# Altium PCB PPSDO.PcbDoc
Units mil, origin at the board's own origin, x right, y up, seen from the top; angles counter-clockwise.
Board outline 905.51 x 787.4 mil, 4 copper layers (Top Layer, Layer 1, Layer 2, Bottom Layer), stack 28.976 mil thick; 74 components, 71 nets, 259 pads, 143 vias.
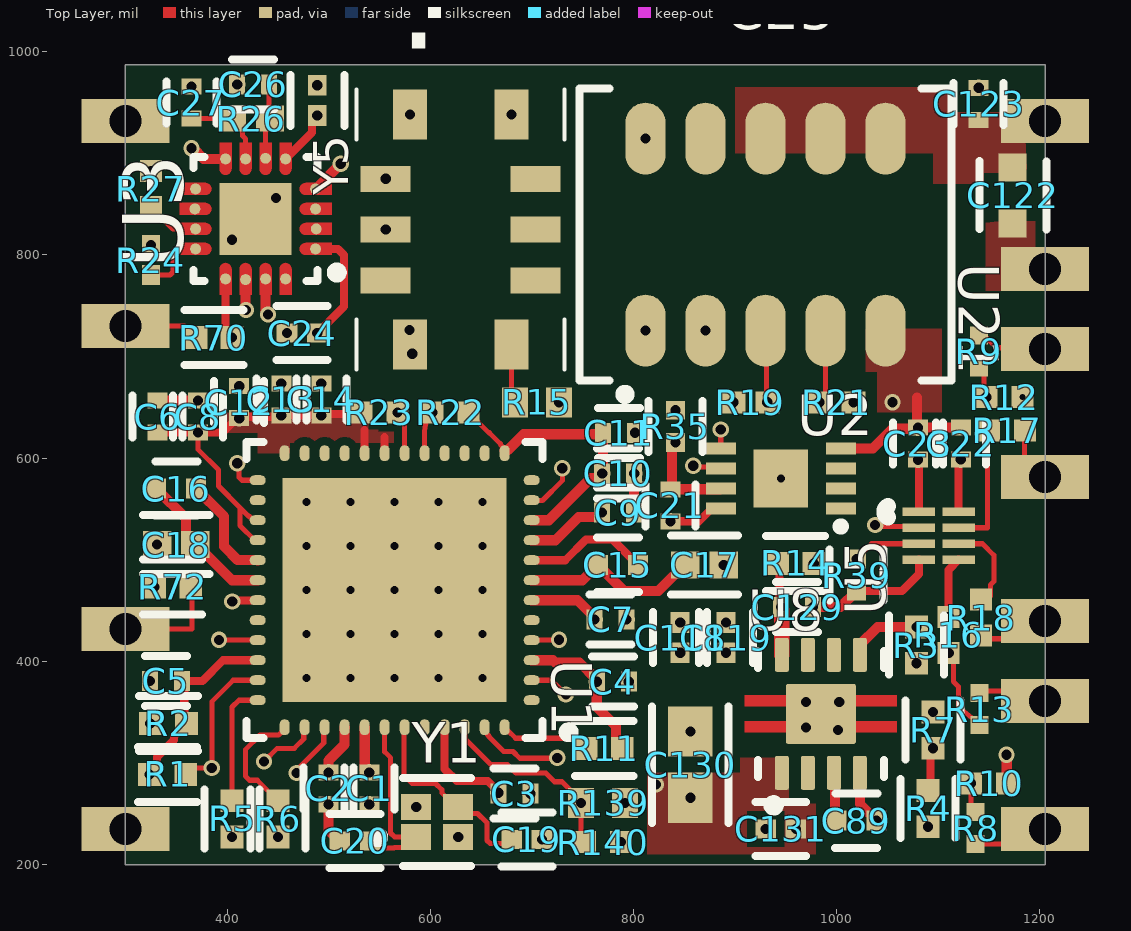
[diagram p0: Top Layer view]
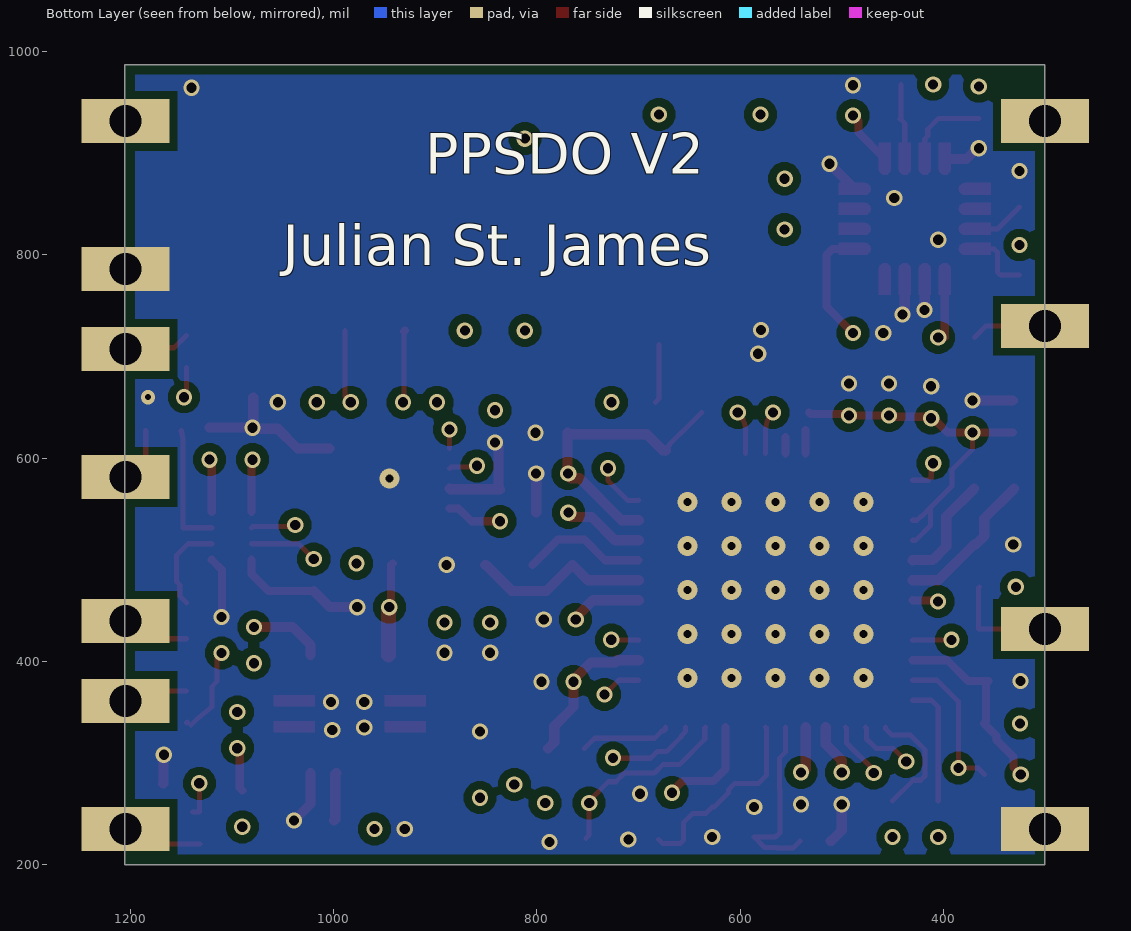
[diagram p1: Bottom Layer view, seen from below]
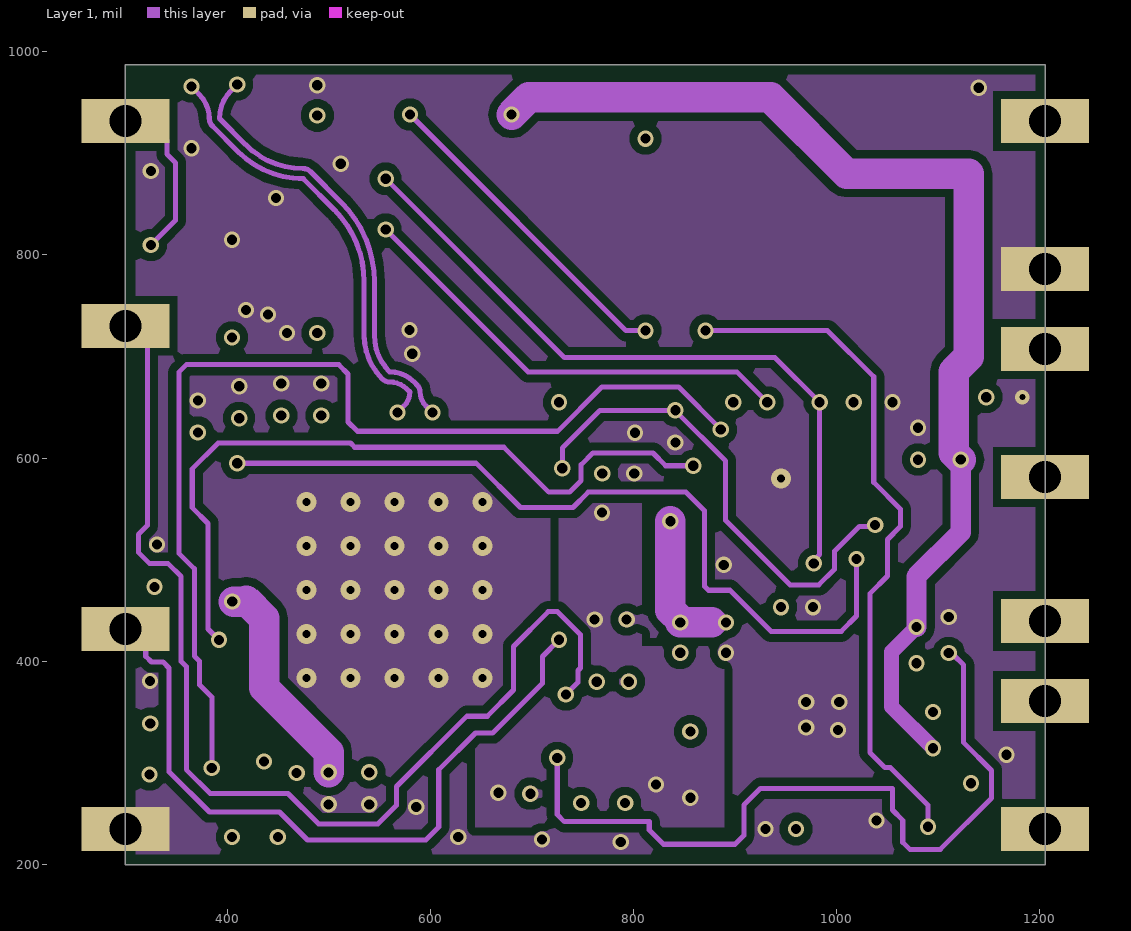
[diagram p2: Layer 1]
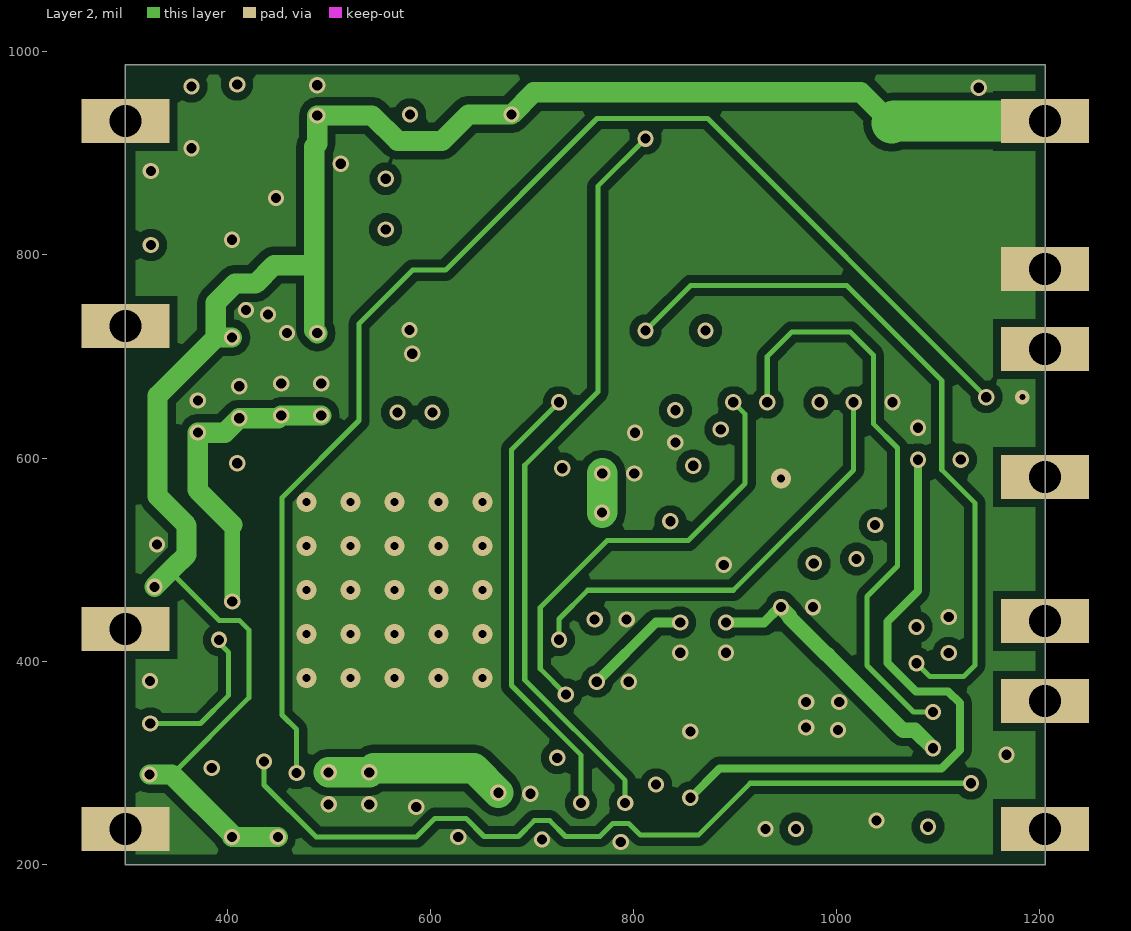
[diagram p3: Layer 2]
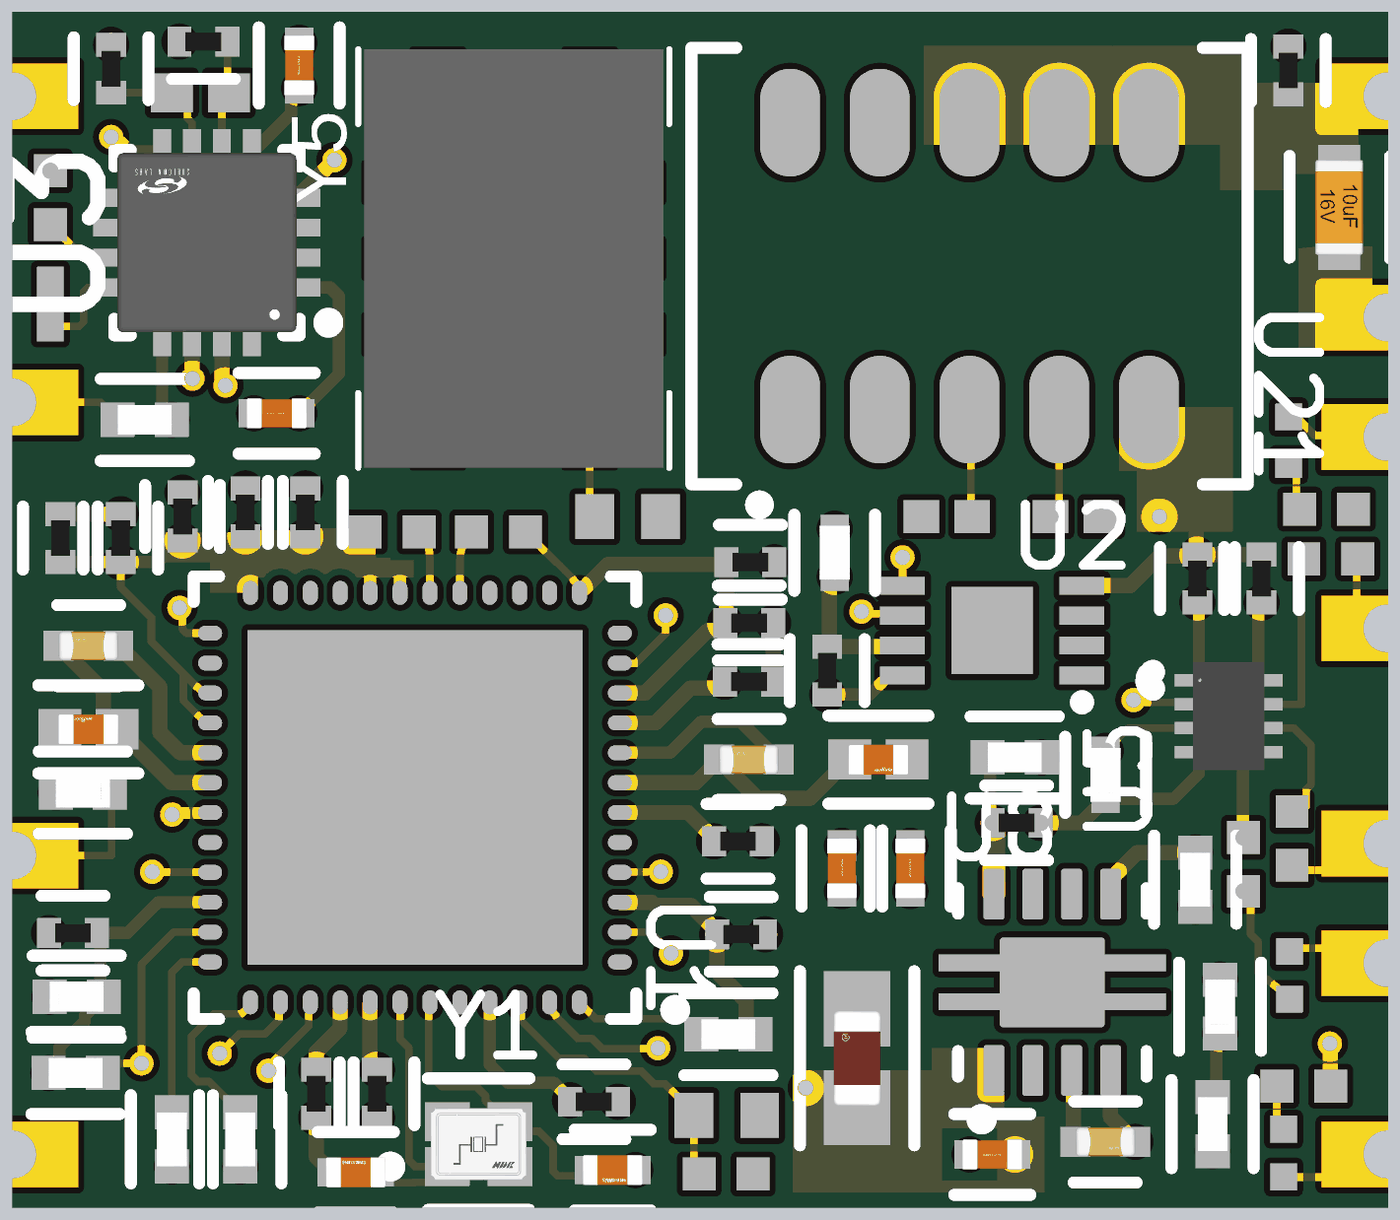
[diagram p4: 3D render of the assembled board from above, using the file's embedded part models]

## Layer stack, top to bottom
Top Solder: solder mask 0.4, Solder Resist, Dk 3.5
Top Layer: signal copper 1.378
Dielectric 2: core 7.9921, Core-009, Dk 4.5
Layer 1: signal copper 1.1811
Dielectric 1: dielectric 7.874, FR-4, Dk 4.8
Layer 2: signal copper 1.1811
Dielectric 3: core 7.9921, Core-009, Dk 4.5
Bottom Layer: signal copper 1.378
Bottom Solder: solder mask 0.4, Solder Resist, Dk 3.5

## Board outline
300,200 300,987.4 1205.51,987.4 1205.51,200

## Design rules (kind name [scope] priority, off if disabled: settings)
BoardOutlineClearance [All] p1: gap=10 ignorepadtopadclearanceinfootprint=FALSE except(0: Arc-SplitContinuation Track-SplitContinuation SMDPad-SplitContinuation THPad-SplitContinuation Via-SplitContinuation Fill-SplitContinuation Poly-SplitContinuation Region-SplitContinuation Text-SplitContinuation)
Clearance [All] p1: gap=8 ignorepadtopadclearanceinfootprint=TRUE
DiffPairsRouting [All] p1: maxlimit=10 minlimit=5 mostfreqgap=5 toplayer_minwidth=5 toplayer_maxwidth=15 toplayer_prefwidth=5 midlayer1_minwidth=5 midlayer1_maxwidth=15 midlayer1_prefwidth=5 midlayer2_minwidth=5 midlayer2_maxwidth=15 midlayer2_prefwidth=5 bottomlayer_minwidth=5 bottomlayer_maxwidth=15 bottomlayer_prefwidth=5 maxuncoupledlength=500
PolygonConnect [All] p1: connectstyle=Direct reliefconductorwidth=10 reliefentries=4 polygonreliefangle="90 Angle" airgapwidth=5
RoutingVias [All] p1: holewidth=10 width=16 viastyle="Through Hole" minholewidth=10 minwidth=16 maxholewidth=28 maxwidth=50
SolderMaskExpansion [All] p1: expansion=4 istentingtop=FALSE
Width [All] p1: maxlimit=50 minlimit=5 preferedwidth=5 minimp=50.000000 maximp=50.000000 favimp=50.000000
29 further rules are at their usual default settings.

## Classes and differential pairs
differential pair class 100ohm: DPLL_9513_1PPS_0 DPLL_9513_1PPS_1 DPLL_OUT_0B DPLL_OUT_1A DPLL_OUT_1B
differential pair DPLL_OUT_0C: +DPLL_OUT_0C_P -DPLL_OUT_0C_N
differential pair DPLL_OUT_1B: +DPLL_OUT_1B_P -DPLL_OUT_1B_N

## Components (designator, comment, footprint, x,y, rotation, side; value= is the part's Value field where it differs from the comment)
C1 "GRM155R71C104KA88D" FP-GRM15-MFG 540,275 r90 top value=0.10μF
C2 "GRM155R71C104KA88D" FP-GRM15-MFG 500,275 r90 top value=0.10μF
C3 "GRM155R71C104KA88D" FP-GRM15-MFG 682.8,269.71 r180 top value=0.10μF
C4 "GRM155R71C104KA88D" FP-GRM15-MFG 779.67,379.96 r0 top value=0.10μF
C5 "GRM155R71C104KA88D" FP-GRM15-MFG 339.89,380.76 r0 top value=0.10μF
C6 "GRM155R71C104KA88D" FP-GRM15-MFG 331.59,640.88 r270 top value=0.10μF
C7 "GRM155R71C104KA88D" FP-GRM15-MFG 777.59,441.24 r0 top value=0.10μF
C8 "GRM155R71C104KA88D" FP-GRM15-MFG 371.29,640.88 r270 top value=0.10μF
C9 "GRM155R71C104KA88D" FP-GRM15-MFG 784.81,546.34 r0 top value=0.10μF
C10 "GRM155R71C104KA88D" FP-GRM15-MFG 785,585 r0 top value=0.10μF
C11 "GRM155R71C104KA88D" FP-GRM15-MFG 785.75,625 r0 top value=0.10μF
C12 "GRM155R71C104KA88D" FP-GRM15-MFG 411.98,655.1 r270 top value=0.10μF
C13 "GRM155R71C104KA88D" FP-GRM15-MFG 453.4,657.81 r270 top value=0.10μF
C14 "GRM155R71C104KA88D" FP-GRM15-MFG 492.8,657.81 r270 top value=0.10μF
C15 "CC0402KRX7R9BB392" FP-CC0402-MFG 784.68,495 r180 top value="3.9 nF"
C16 "CC0402KRX7R9BB392" FP-CC0402-MFG 350,570 r180 top value="3.9 nF"
C17 "GRM155R61A224KE19D" FP-GRM155-0_05-IPC_A 870,495 r0 top
C18 "GRM155R61A224KE19D" FP-GRM155-0_05-IPC_A 350,515 r180 top
C19 "CL05C6R2CB5NNNC" FP-CL468-IPC_C 695.1,224.71 r0 top
C20 "CL05C6R2CB5NNNC" FP-CL468-IPC_C 525.98,223.21 r180 top
C21 "0.1uF_16V_0402" FP-GRM15-MFG 836.36,553.61 r90 top value=0.10μF
C22 "0.1uF_16V_0402" FP-GRM15-MFG 1122.22,614.27 r90 top value=0.10μF
C23 "0.1uF_16V_0402" FP-GRM15-MFG 1080,614.25 r90 top value=0.10μF
C24 "1uF_16V_0402" FP-0402-L_1_0_0_05-W_0_5-IPC_C 473.97,723.07 r180 top
C25 "1uF_16V_0402" FP-0402-L_1_0_0_05-W_0_5-IPC_C 488.81,952.14 r90 top
C26 "0.1uF_16V_0402" FP-GRM15-MFG 425.76,967.84 r0 top value=0.10μF
C27 "0.1uF_16V_0402" FP-GRM15-MFG 365,950 r270 top value=0.10μF
C89 "CC0402KRX7R7BB103" FP-CC0402-MFG 1019.45,243.31 r0 top value="10 nF"
C118 "1uF_16V_0402" FP-0402-L_1_0_0_05-W_0_5-IPC_C 846.02,423.36 r270 top
C119 "1uF_16V_0402" FP-0402-L_1_0_0_05-W_0_5-IPC_C 891.02,423.36 r270 top
C122 "10uF_16V_0603" FP-C1608-MFG 1173.3,858.64 r270 top value=10uF
C123 "GRM155R71C104KA88D" FP-GRM15-MFG 1139.85,948.82 r90 top value=0.10μF
C129 "0.1uF_16V_0402" FP-GRM15-MFG 961.02,453.36 r0 top value=0.10μF
C130 "10uF_16V_0603" FP-MK107BA-IPC_A 856.02,298.36 r90 top
C131 "1uF_16V_0402" FP-0402-L_1_0_0_05-W_0_5-IPC_C 945,235 r180 top
R1 "CRCW040210K0JNED" FP-CRCW0402-e3-IPC_B 341.58,288.64 r180 top
R2 "CRCW040210K0JNED" FP-CRCW0402-e3-IPC_B 342.29,338.91 r0 top
R3 "CRCW040210K0JNED" FP-CRCW0402-e3-IPC_B 1078.53,416 r270 top
R4 "CRCW040210K0JNED" FP-CRCW0402-e3-IPC_B 1090,255 r270 top
R5 "CRCW040210K0JNED" FP-CRCW0402-e3-IPC_B 405,245 r270 top
R6 "CRCW040210K0JNED" FP-CRCW0402-e3-IPC_B 450,245 r270 top
R7 "DNI_10K_5%_0402" FP-CRCW0402-e3-IPC_B 1094.9,332.32 r90 top
R8 "44.2_1%_0402" RESC1005X40X25LL05T05 1136.76,235.89 r270 top
R9 "44.2_1%_0402" RESC1005X40X25LL05T05 1140,705 r90 top
R10 "49.9_1%_0402" RESC1005X40X25NL05T05 1150,280 r180 top
R11 "CRCW040210K0JNED" FP-CRCW0402-e3-IPC_B 771.27,314.19 r0 top
R12 "49.9_1%_0402" RESC1005X40X25NL05T05 1165,660 r180 top
R13 "44.2_1%_0402" RESC1005X40X25LL05T05 1140.63,352.9 r90 top
R14 "DNI_10K_5%_0402" FP-CRCW0402-e3-IPC_B 959.71,496.48 r0 top
R15 "DNI_44.2_1%_0402" RESC0402(1005)_M 705,655 r180 top value="44.20 Ohm"
R16 "49.9_1%_0402" RESC1005X40X25NL05T05 1110.33,426 r270 top
R17 "49.9_1%_0402" RESC1005X40X25NL05T05 1167.78,627.22 r180 top
R18 "49.9_1%_0402" RESC1005X40X25NL05T05 1142.32,443.14 r90 top
R19 "0_5%_0402" RESC1005X40X25NL05T10 915,655 r0 top
R21 "0_5%_0402" RESC1005X40X25NL05T10 1000,655 r180 top
R22 "49.9_1%_0402" RESC1005X40X25NL05T05 620,645 r180 top
R23 "49.9_1%_0402" RESC1005X40X25NL05T05 550,645 r0 top
R24 "33_1%_0402" RESC1005X40X25LL05T10 325,795 r90 top
R26 "100_1%_0402" RESC1005X40X25ML05T10 423.72,934.09 r180 top
R27 "49.9_1%_0402" RESC1005X40X25NL05T05 325,865 r90 top
R35 "CRCW0402100RFKED" FP-CRCW0402-e3-IPC_C 841.28,631.24 r270 top
R39 "CRCW0402100RFKED" FP-CRCW0402-e3-IPC_C 1019.56,484.99 r270 top
R70 "CRCW040210K0JNED" FP-CRCW0402-e3-IPC_B 387.17,718.75 r0 top
R72 "CRCW040210K0JNED" FP-CRCW0402-e3-IPC_B 346.39,473.33 r180 top
R139 "44.2_1%_0402" RESC0402(1005)_M 770.19,260.69 r0 top value="44.20 Ohm"
R140 "49.9_1%_0402" RESC1005X40X25NL05T05 769.83,222.11 r180 top
U1 "AD9546" AD9546 565,470 r180 top
U2 "24AA16T-I/MNY" TDFN-MN8 945,580 r180 top locked
U3 "SI53307-B-GM" FP-SI53307-B-GM-MFG 428.08,835.45 r180 top
U5 "NLSV2T244MUTAG" UDFN8_1P20X1P80_ONS 1100.5,523.62 r0 top
U8 "TPS73718DRBR" DRB0008A_V 984.45,348.31 r90 top
U21 "SIT5711" SIT5711 930,820 r90 top
Y1 "NX1612SA-50M-EXS00A-CS08403" FP-NX1612SA-MFG 606.85,241.79 r0 top
Y5 "SiTime_SiT5501AC-WU-33E0-10T" SITIME_SPL-086-CQFN-010-C07050_REV_DRAFT 630,825 r0 top

## Footprints (in the part's own frame and the unit in brackets; to place one, negate y for a bottom-side part, rotate by r counter-clockwise, add the part's x,y. Pads: shape width x height; smd on the part's side, far side on the other; paste and mask are expansions set on the pad)
AD9546 [mm] "QFN, 48-Leads, Body 7.00x7.00mm, Pitch 0.50mm, Thermal Pad 5.60x5.60mm, IPC Medium Density"
  oval 0.4x0.25 smd: 1(-3.425,2.75) 2(-3.425,2.25) 3(-3.425,1.75) 4(-3.425,1.25) 5(-3.425,0.75) 6(-3.425,0.25) 7(-3.425,-0.25) 8(-3.425,-0.75) 9(-3.425,-1.25) 10(-3.425,-1.75) 11(-3.425,-2.25) 12(-3.425,-2.75) 25(3.425,-2.75) 26(3.425,-2.25) 27(3.425,-1.75) 28(3.425,-1.25) 29(3.425,-0.75) 30(3.425,-0.25) 31(3.425,0.25) 32(3.425,0.75) 33(3.425,1.25) 34(3.425,1.75) 35(3.425,2.25) 36(3.425,2.75)
  oval 0.25x0.4 smd: 13(-2.75,-3.425) 14(-2.25,-3.425) 15(-1.75,-3.425) 16(-1.25,-3.425) 17(-0.75,-3.425) 18(-0.25,-3.425) 19(0.25,-3.425) 20(0.75,-3.425) 21(1.25,-3.425) 22(1.75,-3.425) 23(2.25,-3.425) 24(2.75,-3.425) 37(2.75,3.425) 38(2.25,3.425) 39(1.75,3.425) 40(1.25,3.425) 41(0.75,3.425) 42(0.25,3.425) 43(-0.25,3.425) 44(-0.75,3.425) 45(-1.25,3.425) 46(-1.75,3.425) 47(-2.25,3.425) 48(-2.75,3.425)
  rect 5.6x5.6 smd: 49(0,0)
  silkscreen extent -4.47,-3.7 3.7,3.7, body extent -3.55,-3.55 3.55,3.55, height 0.8
DRB0008A_V [mm] "SON, 8-Leads, Body 3x3mm, Pitch 0.65mm, Thermal Pad 1.50 x 3.8mm"
  rrect29% 0.85x0.35 smd: 1(-1.475,0.975) 2(-1.475,0.325) 3(-1.475,-0.325) 4(-1.475,-0.975) 5(1.475,-0.975) 6(1.475,-0.325) 7(1.475,0.325) 8(1.475,0.975)
  rrect7% 1.5x1.75 smd: 9(0,0)
  Top Layer region: -0.185,0.875 -0.185,1.9 -0.465,1.9 -0.465,0.875
  Top Layer region: 0.185,-0.875 0.185,-1.9 0.465,-1.9 0.465,-0.875
  Top Layer region: -0.185,-0.875 -0.185,-1.9 -0.465,-1.9 -0.465,-0.875
  Top Layer region: 0.185,0.875 0.185,1.9 0.465,1.9 0.465,0.875
  silkscreen extent -2.42,-1.58 1.57,1.57, body extent -1.5,-1.5 1.5,1.5, height 1
FP-0402-L_1_0_0_05-W_0_5-IPC_C [mil]
  rect 20.29x18.6 smd paste+0 mask+0: 1(-14.9,0) 2(14.9,0)
  silkscreen extent -25,-27 25,27, body extent -29,-15 29,15, height 10
FP-C1608-MFG [mm]
  rect 0.7x0.7 smd paste+0 mask+0: 1(-0.7,0) 2(0.7,0)
  silkscreen extent -0.86,-0.83 0.85,0.85, body extent -1.15,-0.55 1.15,0.55, height 0.25
FP-CC0402-MFG [mm]
  rect 0.5x0.5 smd paste+0 mask+0: 1(-0.5,0) 2(0.5,0)
  silkscreen extent -0.53,-0.68 0.53,0.67, body extent -0.87,-0.48 0.87,0.48, height 0.25
FP-CL468-IPC_C [mil]
  rect 20.29x18.6 smd paste+0 mask+0: 1(-14.9,0) 2(14.9,0)
  silkscreen extent -25,-27 25,27, body extent -29,-15 29,15, height 10
FP-CRCW0402-e3-IPC_B [mil]
  rect 22.37x22.54 smd paste+0 mask+0: 1(-17.8,0) 2(17.8,0)
  silkscreen extent -29,-27 29,27, body extent -35,-17 35,17, height 10
FP-CRCW0402-e3-IPC_C [mil]
  rect 18.43x18.6 smd paste+0 mask+0: 1(-15.83,0) 2(15.83,0)
  silkscreen extent -25,-27 25,27, body extent -29,-15 29,15, height 10
FP-GRM15-MFG [mm]
  rect 0.4x0.5 smd paste+0 mask+0: 1(-0.4,0) 2(0.4,0)
  silkscreen extent -0.53,-0.63 0.53,0.63, body extent -0.7,-0.38 0.7,0.38, height 0.25
FP-GRM155-0_05-IPC_A [mil]
  rect 28.16x26.48 smd paste+0 mask+0: 1(-18.84,0) 2(18.84,0)
  silkscreen extent -33,-29 33,29, body extent -41,-21 41,21, height 10
FP-MK107BA-IPC_A [mil]
  rect 49.52x43.78 smd paste+0 mask+0: 1(-32.57,0) 2(32.57,0)
  silkscreen extent -57,-38 57,38, body extent -77,-42 77,42, height 10
FP-NX1612SA-MFG [mm]
  rect 0.75x0.65 smd paste+0 mask+0: 1(-0.525,-0.375) 2(0.525,-0.375) 3(0.525,0.375) 4(-0.525,0.375)
  silkscreen extent -1.6,-1.1 0.85,1.1, body extent -1,-0.8 1,0.8, height 0.25
FP-SI53307-B-GM-MFG [mm]
  round 0.27 smd paste+0 mask+0: 1(-1.5,0.75) 2(-1.515,0.25) 3(-1.5,-0.25) 4(-1.5,-0.75) 5(-0.75,-1.5) 6(-0.25,-1.515) 7(0.25,-1.5) 8(0.75,-1.5) 9(1.5,-0.75) 10(1.515,-0.25) 11(1.5,0.25) 12(1.5,0.75) 13(0.75,1.5) 14(0.25,1.515) 15(-0.25,1.5) 16(-0.75,1.5)
  rect 1.8x1.8 smd paste-1000 mask+0: 17(0,0)
  Top Layer region: 1.9,0.1 1.25,0.1 1.193,0.111 1.144,0.144 1.111,0.193 1.1,0.25 1.1,0.25 1.111,0.307 1.144,0.356 1.193,0.389 1.25,0.4 1.25,0.4 1.9,0.4
  Top Layer region: -0.6,1.9 -0.6,1.25 -0.611,1.193 -0.644,1.144 -0.693,1.111 -0.75,1.1 -0.75,1.1 -0.807,1.111 -0.856,1.144 -0.889,1.193 -0.9,1.25 -0.9,1.25 -0.9,1.9
  Top Layer region: -0.1,1.9 -0.1,1.25 -0.111,1.193 -0.144,1.144 -0.193,1.111 -0.25,1.1 -0.25,1.1 -0.307,1.111 -0.356,1.144 -0.389,1.193 -0.4,1.25 -0.4,1.25 -0.4,1.9
  Top Layer region: 0.4,1.9 0.4,1.25 0.389,1.193 0.356,1.144 0.307,1.111 0.25,1.1 0.25,1.1 0.193,1.111 0.144,1.144 0.111,1.193 0.1,1.25 0.1,1.25 0.1,1.9
  Top Layer region: 0.9,1.9 0.9,1.25 0.889,1.193 0.856,1.144 0.807,1.111 0.75,1.1 0.75,1.1 0.693,1.111 0.644,1.144 0.611,1.193 0.6,1.25 0.6,1.25 0.6,1.9
  Top Layer region: 1.9,0.6 1.25,0.6 1.193,0.611 1.144,0.644 1.111,0.693 1.1,0.75 1.1,0.75 1.111,0.807 1.144,0.856 1.193,0.889 1.25,0.9 1.25,0.9 1.9,0.9
  Top Layer region: 1.9,-0.4 1.25,-0.4 1.193,-0.389 1.144,-0.356 1.111,-0.307 1.1,-0.25 1.1,-0.25 1.111,-0.193 1.144,-0.144 1.193,-0.111 1.25,-0.1 1.25,-0.1 1.9,-0.1
  Top Layer region: 1.9,-0.9 1.25,-0.9 1.193,-0.889 1.144,-0.856 1.111,-0.807 1.1,-0.75 1.1,-0.75 1.111,-0.693 1.144,-0.644 1.193,-0.611 1.25,-0.6 1.25,-0.6 1.9,-0.6
  Top Layer region: 0.6,-1.9 0.6,-1.25 0.611,-1.193 0.644,-1.144 0.693,-1.111 0.75,-1.1 0.75,-1.1 0.807,-1.111 0.856,-1.144 0.889,-1.193 0.9,-1.25 0.9,-1.25 0.9,-1.9
  Top Layer region: 0.1,-1.9 0.1,-1.25 0.111,-1.193 0.144,-1.144 0.193,-1.111 0.25,-1.1 0.25,-1.1 0.307,-1.111 0.356,-1.144 0.389,-1.193 0.4,-1.25 0.4,-1.25 0.4,-1.9
  Top Layer region: -0.4,-1.9 -0.4,-1.25 -0.389,-1.193 -0.356,-1.144 -0.307,-1.111 -0.25,-1.1 -0.25,-1.1 -0.193,-1.111 -0.144,-1.144 -0.111,-1.193 -0.1,-1.25 -0.1,-1.25 -0.1,-1.9
  Top Layer region: -0.9,-1.9 -0.9,-1.25 -0.889,-1.193 -0.856,-1.144 -0.807,-1.111 -0.75,-1.1 -0.75,-1.1 -0.693,-1.111 -0.644,-1.144 -0.611,-1.193 -0.6,-1.25 -0.6,-1.25 -0.6,-1.9
  Top Layer region: -1.9,-0.6 -1.25,-0.6 -1.193,-0.611 -1.144,-0.644 -1.111,-0.693 -1.1,-0.75 -1.1,-0.75 -1.111,-0.807 -1.144,-0.856 -1.193,-0.889 -1.25,-0.9 -1.25,-0.9 -1.9,-0.9
  Top Layer region: -1.9,-0.1 -1.25,-0.1 -1.193,-0.111 -1.144,-0.144 -1.111,-0.193 -1.1,-0.25 -1.1,-0.25 -1.111,-0.307 -1.144,-0.356 -1.193,-0.389 -1.25,-0.4 -1.25,-0.4 -1.9,-0.4
  Top Layer region: -1.9,0.4 -1.25,0.4 -1.193,0.389 -1.144,0.356 -1.111,0.307 -1.1,0.25 -1.1,0.25 -1.111,0.193 -1.144,0.144 -1.193,0.111 -1.25,0.1 -1.25,0.1 -1.9,0.1
  Top Layer region: -1.9,0.9 -1.25,0.9 -1.193,0.889 -1.144,0.856 -1.111,0.807 -1.1,0.75 -1.1,0.75 -1.111,0.693 -1.144,0.644 -1.193,0.611 -1.25,0.6 -1.25,0.6 -1.9,0.6
  silkscreen extent -2.15,-1.55 1.55,1.55, body extent -2,-2 2,2, height 0.25
RESC0402(1005)_M [mm] "Chip Resistor, Body 1.0x0.5mm, IPC Low Density"
  rect 0.65x0.75 smd: 1(-0.55,0) 2(0.55,0)
  body extent -0.52,-0.28 0.53,0.28, height 0.4
RESC1005X40X25LL05T05 [mm] "Chip Resistor, 2-Leads, Body 1.00x0.50mm, IPC High Density"
  rect 0.45x0.45 smd: 1(-0.4,0) 2(0.4,0)
  body extent -0.53,-0.27 0.53,0.28, height 0.4
RESC1005X40X25LL05T10 [mm] "Chip Resistor, 2-Leads, Body 1.00x0.50mm, IPC High Density"
  rect 0.5x0.45 smd: 1(-0.375,0) 2(0.375,0)
  body extent -0.53,-0.27 0.53,0.28, height 0.4
RESC1005X40X25ML05T10 [mm] "Chip Resistor, 2-Leads, Body 1.00x0.50mm, IPC Low Density"
  rect 0.7x0.65 smd: 1(-0.475,0) 2(0.475,0)
  body extent -0.53,-0.27 0.53,0.28, height 0.4
RESC1005X40X25NL05T05 [mm] "Chip Resistor, 2-Leads, Body 1.00x0.50mm, IPC Medium Density"
  rect 0.55x0.55 smd: 1(-0.45,0) 2(0.45,0)
  body extent -0.53,-0.27 0.53,0.28, height 0.4
RESC1005X40X25NL05T10 [mm] "Chip Resistor, 2-Leads, Body 1.00x0.50mm, IPC Medium Density"
  rect 0.6x0.55 smd: 1(-0.425,0) 2(0.425,0)
  body extent -0.53,-0.27 0.53,0.28, height 0.4
SIT5711 [mm]
  oval 1.8x1 smd: 1(-2.4,3) 2(-2.4,1.5) 3(-2.4,0) 4(-2.4,-1.5) 5(-2.4,-3) 6(2.4,3) 7(2.4,1.5) 8(2.4,0) 9(2.4,-1.5) 10(2.4,-3)
  silkscreen extent -4.04,-4.65 3.65,4.65, body extent -3.5,-4.5 3.5,4.5, height 6.2
SITIME_SPL-086-CQFN-010-C07050_REV_DRAFT [mm] "Package information (Page 9): https://www.sitime.com/support/resource-library/datasheets/sit5501-datasheet"
  rect 0.85x1.25 smd paste+0 mask+0.05: 1(-1.27,2.875) 5(-1.27,-2.875) 6(1.27,-2.875) 10(1.27,2.875)
  rect 1.25x0.65 smd paste+0 mask+0.05: 2(-1.875,1.27) 3(-1.875,0) 4(-1.875,-1.27) 7(1.875,-1.27) 8(1.875,0) 9(1.875,1.27)
  silkscreen extent -2.6,-3.5 2.6,3.5, body extent -2.5,-3.5 2.5,3.5, height 2.3
TDFN-MN8 [mm] "SON, 8-Leads, Body 2x3mm, Pitch 0.5mm, Microchip Recommended"
  rect 0.75x0.3 smd: 1(-1.5,0.75) 2(-1.5,0.25) 3(-1.5,-0.25) 4(-1.5,-0.75) 5(1.5,-0.75) 6(1.5,-0.25) 7(1.5,0.25) 8(1.5,0.75)
  rect 1.36x1.46 smd: 9(0,0)
  silkscreen extent -1.55,1.15 -1.45,1.25, body extent -1.52,-1.02 1.52,1.02, height 0.8
UDFN8_1P20X1P80_ONS [mil]
  rect 32x8 smd paste+0 mask+0: 1(-19.5,23.62) 2(-19.5,7.87) 3(-19.5,-7.87) 4(-19.5,-23.62) 5(19.5,-23.62) 6(19.5,-7.87) 7(19.5,7.87) 8(19.5,23.62)
  silkscreen extent -53,18 -50,29, body extent -24,-36 24,36, height 22

## Part data
C1 C2 C3 C4 C5 C6 C7 C8 C9 C10 C11 C12 C13 C14 C123: library part CMP-2100-03641-2, "CAP CER 0.1UF 16V X7R 0402", Capacitance=0.10μF, Manufacturer=Murata, Package=GRM15, Temperature="-55°C to +125°C", Temperature Characteristic=X7R, Temperature Range High=+125°C, Temperature Range Low=-55°C, Tolerance=10%, Voltage Rating=16Vdc, Category=Cap, ComponentLink2Description=Datasheet, ComponentLink2URL=https://search.murata.co.jp/Ceramy/image/img/A01X/G101/ENG/GRM155R71H471KA01-01A.pdf, Device Class L1="Passive Components", Device Class L2=Capacitors, Device Class L3="Ceramic Capacitors", Digikey Description="CAP CER 0.1UF 16V X7R 0402", Height=0.55mm, Ipc Land Pattern Name=CAPC10050X219, Lead Free=yes, Manufacturer Part Number=GRM155R71C104KA88D, Material=Ceramic, Mouser Description="0402 0.1 uF 16V ±10 % Tolerance X7R SMT Multilayer Ceramic Capacitor", Octopart=https://octopart.com/grm155r71c104ka88d-murata-196880, RoHS=TRUE, Standoff Height=0mm
C15 C16: library part CMP-03422-000890-1, "CAP CER 3900PF 50V X7R 0402", Capacitance="3.9 nF", Manufacturer=YAGEO, Package=CC0402, Temperature="-55°C to +125°C", Temperature Characteristic=X7R, Temperature Coefficient=30ppm/°C, Temperature Range High=+125°C, Temperature Range Low=-55°C, Tolerance=0.1, Voltage Rating="50 V", Automotive=No, Automotive Grade=NA, Category=Cap, ComponentLink2Description=Datasheet, ComponentLink2URL=http://www.yageo.com/documents/recent/UPY-GP_NP0_16V-to-50V_16.pdf, Device Class L1="Passive Components", Device Class L2=Capacitors, Device Class L3="Ceramic Capacitors", Digikey Description="CAP CER 3900PF 50V X7R 0402", Footprint Url=http://www.yageo.com/exep/pages/download/literatures/UPY-C_GEN_24.pdf, Height=0.55mm, Ipc Land Pattern Name=CAPC10050X50, Lead Free=Yes, Manufacturer Part Number=CC0402KRX7R9BB392, Material=Ceramic, Mouser Description="Multilayer Ceramic Capacitors MLCC - SMD/SMT 3.9nF 50V X7R 10%", Octopart=https://octopart.com/cc0402krx7r9bb392-yageo-9291741, RoHS=TRUE
C17 C18: library part CMP-2008-04561-5, "CAP CER 0.22UF 10V X5R 0402", Capacitance=220nF, Case Code (Imperial)=0402, Case Code (Metric)=1005, Dielectric=X5R, Dielectric Material=Ceramic, Insulation Resistance=10GR, Max Operating Temperature=85°C, Min Operating Temperature=-55°C, Package Quantity=1, Tolerance=10%, Voltage=10V, Case/Package=0402, Depth=0.5mm, Height=0.5mm, Lead Free="Lead Free", Length=1mm, Material=Ceramic, Mount="Surface Mount", Number of Pins=2, Packaging="Tape and Reel", Radiation Hardening=No, REACH SVHC="No SVHC", RoHS Compliant=Yes, Series=GRM, Termination=SMD/SMT, Thickness=0.022inch, Voltage Rating=10V, Voltage Rating (DC)=10V, Width=0.5mm
C19 C20: library part CMP-13271-000420-1, "Cap Ceramic 6.2pF 50V C0G ±0.25pF SMD 0402 +125°C Paper T/R", Capacitance=6.2pF, Case Code (Imperial)=0402, Case Code (Metric)=1005, Dielectric=C0G, Max Operating Temperature=125°C, Min Operating Temperature=-55°C, Voltage Rating=50V, Case/Package=0402, Depth=0.5mm, Height=0.5mm, Length=1mm, Mount="Surface Mount", Packaging="Tape and Reel", Radiation Hardening=No, Thickness=0.022inch, Voltage Rating (DC)=50V, Width=0.02inch
C21 C22 C23 C26 C27 C129: library part CMP-2100-03641-2, "CAP CER 0.1UF 16V X7R 0402", Capacitance=0.10μF, Manufacturer=Murata, Manufacturer Part Number=GRM155R71C104KA88D, Package=GRM15, Temperature="-55°C to +125°C", Temperature Characteristic=X7R, Temperature Range High=+125°C, Temperature Range Low=-55°C, Tolerance=10%, Voltage Rating=16Vdc, Category=Cap, ComponentLink2Description=Datasheet, ComponentLink2URL=https://search.murata.co.jp/Ceramy/image/img/A01X/G101/ENG/GRM155R71H471KA01-01A.pdf, Device Class L1="Passive Components", Device Class L2=Capacitors, Device Class L3="Ceramic Capacitors", Digikey Description="CAP CER 0.1UF 16V X7R 0402", Height=0.55mm, Ipc Land Pattern Name=CAPC10050X219, Lead Free=yes, Material=Ceramic, Mouser Description="0402 0.1 uF 16V ±10 % Tolerance X7R SMT Multilayer Ceramic Capacitor", Octopart=https://octopart.com/grm155r71c104ka88d-murata-196880, RoHS=TRUE, Standoff Height=0mm
C24 C25 C118 C119 C131: library part CMP-14477-003537-2, "None", Capacitance=1uF, Case/Package=0402, Dielectric=X5R, Max Operating Temperature=85°C, Min Operating Temperature=-55°C, Package Quantity=10000, Tolerance=20%, Voltage=16V, Construction=Flat, Depth=0.5mm, Halogen Free="Halogen Free", Height=0.5mm, Length=1mm, Mount="Surface Mount", Packaging="Tape and Reel", Radiation Hardening=No, RoHS Compliant=Yes, Series=M, Thickness=0.022inch, Voltage Rating=16V, Voltage Rating (DC)=16V, Width=0.02inch
C89: library part CMP-03422-000501-1, "CAP CER 10000PF 16V X7R 0402", Capacitance="10 nF", Manufacturer=YAGEO, Package=CC0402, Temperature="-55°C to +125°C", Temperature Characteristic=X7R, Temperature Coefficient=30ppm/°C, Temperature Range High=+125°C, Temperature Range Low=-55°C, Tolerance=0.1, Voltage Rating="16 V", Automotive=No, Automotive Grade=NA, Category=Cap, ComponentLink2Description=Datasheet, ComponentLink2URL=http://www.yageo.com/documents/recent/UPY-GP_NP0_16V-to-50V_16.pdf, Device Class L1="Passive Components", Device Class L2=Capacitors, Device Class L3="Ceramic Capacitors", Digikey Description="CAP CER 10000PF 16V X7R 0402", Footprint Url=http://www.yageo.com/exep/pages/download/literatures/UPY-C_GEN_24.pdf, Height=0.55mm, Ipc Land Pattern Name=CAPC10050X50, Lead Free=Yes, Manufacturer Part Number=CC0402KRX7R7BB103, Material=Ceramic, Mouser Description="0402 10 nF 16 V ±10 % Tolerance X7R SMT Multilayer Ceramic Capacitor", Octopart=https://octopart.com/cc0402krx7r7bb103-yageo-192895, RoHS=TRUE
C122: library part CMP-08246-000019-1, "CAP CER 10UF 16V X5R 0603", Capacitance=10uF, Manufacturer="TDK Corporation", Manufacturer Part Number=C1608X5R1C106M080AB, Package=C1608, Temperature="-55°C to +85°C", Temperature Characteristic=X5R, Temperature Coefficient=15%, Temperature Range High=+85°C, Temperature Range Low=-55°C, Tolerance=20%, Voltage Rating=16V, Automotive=No, Category=Cap, ComponentLink2Description=Datasheet, ComponentLink2URL=https://upverter.com/datasheet/6fbac97fd59b4a24a005814037d2a36a27db40e9.pdf, Device Class L1="Passive Components", Device Class L2=Capacitors, Device Class L3="Ceramic Capacitors", Digikey Description="CAP CER 10UF 16V X5R 0603", Height=0.9mm, Ipc Land Pattern Name=CAPC16080X80, Lead Free=Yes, Material=Ceramic, Mouser Description="Multilayer Ceramic Capacitors MLCC - SMD/SMT 0603 10uF 16volts X5R +/-20% GP", Octopart=https://octopart.com/c1608x5r1c106m080ab-tdk-26013480, RoHS=TRUE
C130: library part CMP-2000-06226-3, "None", Capacitance=10uF, Case Code (Imperial)=0603, Case Code (Metric)=1608, Dielectric=X5R, Max Operating Temperature=85°C, Min Operating Temperature=-55°C, Package Quantity=1, Tolerance=20%, Voltage Rating=16V, Case/Package=0603, Construction=Flat, Halogen Free="Halogen Free", Height=0.8mm, Length=0.063inch, Mount="Surface Mount", Packaging="Tape and Reel", RoHS Compliant=Yes, Series=M, Termination=SMD/SMT, Thickness=0.031inch, Voltage Rating (DC)=16V, Width=0.031inch
R1 R2 R3 R4 R5 R6 R7 R11 R14 R70 R72: library part CMP-2002-08136-3, "RES Thick Film, 10kΩ, 5%, 0.063W, 200ppm/°C, 0402", Case Code (Imperial)=0402, Case Code (Metric)=1005, Max Operating Temperature=155°C, Max Power Dissipation=63mW, Min Operating Temperature=-55°C, Package Quantity=1, Resistance=10kR, Temperature Coefficient=200ppm/°C, Tolerance=5%, Voltage Rating=50V, Case/Package=0402, Composition="Thick Film", Contact Plating=Tin, Depth=0.5mm, Features="Automotive AEC-Q200", Height=0.016inch, Length=1mm, Military Standard=Not, Mount="Surface Mount", Number of Terminations=2, Packaging="Tape and Reel", Power Rating=63mW, Radiation Hardening=No, Termination=SMD/SMT, Weight=2.3E-05oz, Width=0.5mm
R8 R9 R13: library part CMP-2002-00011-1, Manufacturer="Vishay Dale", Part Number=CRCW040244R2FKED
R10 R12 R16 R17 R18 R22 R23 R27 R140: library part CMP-2002-00969-1, Manufacturer=Panasonic, Part Number=ERJ-2RKF49R9X
R15 R139: library part CMP-1011-00357-1, "44R2 0.063W 1% 0402 (1005 Metric)  SMD", Case-EIA=0402, Case-Metric=1005, Power="0.063 W", Tolerance="1 %", Technology=SMT
R19 R21: library part CMP-1011-00001-2, Manufacturer="Yageo / Phycomp", Part Number=RC0402JR-070RL
R24: library part CMP-2002-07619-1, Manufacturer="Yageo / Phycomp", Part Number=RC0402FR-0733RL
R26: library part CMP-2002-07344-1, Manufacturer="Yageo / Phycomp", Part Number=RC0402FR-07100RL
R35 R39: library part CMP-1011-00397-3, "RES Thick Film, 100Ω, 1%, 0.063W, 100ppm/°C, 0402", Case Code (Imperial)=0402, Case Code (Metric)=1005, Max Operating Temperature=155°C, Max Power Dissipation=63mW, Min Operating Temperature=-55°C, Package Quantity=10, Resistance=100R, Temperature Coefficient=100ppm/°C, Tolerance=1%, Voltage Rating=50V, Case/Package=0402, Composition="Thick Film", Contact Plating=Tin, Depth=0.5mm, Features="Automotive AEC-Q200", Height=0.35mm, Lead Free="Lead Free", Length=1mm, Military Standard=Not, Mount="Surface Mount", Number of Terminations=2, Packaging="Tape and Reel", Power Rating=63mW, Radiation Hardening=No, Termination=SMD/SMT, Voltage Rating (DC)=50V, Weight=2.3E-05oz, Width=0.02inch, Working Voltage=50V
U2: library part CMP-0159-00483-1, "16Kbit, 400kHz, 1.7V, I2C Serial EEPROM, 8-Pin TDFN (NiPdAu finish), Industrial Temperature, Tape and Reel", DatasheetVersion="revJ, Oct-2009", PackageDescription="8-Lead Plastic Dual Flat, No Lead Package (MN) - 2x3x0.75mm Body [TDFN]", PackageReference=TDFN-MN8, PackageVersion="revBB, Aug-2009"
U3: library part CMP-08071-000001-1, "IC CLK BUFFER 2:4 725MHZ 16QFN", Ambient Temperature Range High=+85°C, Ambient Temperature Range Low=-40°C, Manufacturer="Silicon Labs", Max Junction Temp=+125°C, Max Supply Voltage=3.63V, Min Supply Voltage=1.71V, Nominal Supply Current=65mA, Package=0, Temperature="-40°C to +85°C", Automotive=No, Category=IC, ComponentLink2Description=Datasheet, ComponentLink2URL=https://www.silabs.com/documents/public/data-sheets/si5330x-datasheet.pdf, Device Class L1="Integrated Circuits (ICs)", Device Class L2="Clock and Timing", Device Class L3="Clock Buffers", Digikey Description="IC CLK BUFFER 2:4 725MHZ 16QFN", Height=0.9mm, Ipc Land Pattern Name=QFN50P300X300X85-16, Lead Free=Yes, Logic Function=Non-Inverting, Manufacturer Part Number=SI53307-B-GM, Mouser Description="Clock Buffer 1:2 Univ bufr/Lvl Trans 725MHz", Number of Elements=1, Number of Inputs=2, Number of Outputs=4, Octopart=https://octopart.com/si53307-b-gm-silicon+labs-51374320, Propagation Delay=875ps, RoHS=TRUE, Standoff Height=0mm, Temperature Range High=+85°C, Temperature Range Low=-40°C
U5: "No Description Available", Mfr_Name=onsemi, Copyright="Copyright (C) 2023 Ultra Librarian. All rights reserved.", Manufacturer_Part_Number=NLSV2T244MUTAG, RefDes=RefDes, Type=DEV
U8: library part CMP-0395-00613-2, "Single Output LDO, 1 A, Fixed 1.8 V Output, 2.2 to 5.5 V Input, with Reverse Current Protection, 8-pin SON (DRB), -40 to 125 degC, Green (RoHS & no Sb/Br)", Manufacturer="Texas Instruments", Rating=Catalog, Accuracy(%)=3, ComponentLink1Description="Manufacturer URL", ComponentLink1URL=http://www.ti.com/, ComponentLink2Description=Datasheet, ComponentLink2URL=http://www.ti.com/general/docs/lit/getliterature.tsp?genericPartNumber=TPS73718&fileType=pdf, ComponentLink3Description="Package Specification", ComponentLink3URL=http://www.ti.com/litv/pdf/mpds118h, DatasheetVersion=SBVS067O, Eco-Plan="Green (RoHS & no Sb/Br)", Fixed Output Options(V)=1.8, Iout(Max)(A)=1, Iq(Typ)(mA)=0.3, Mounting Technology="Surface Mount", PackageDescription="8-Pin Plastic Small Outline, Body 3 x 3 mm, Pitch 0.65 mm", PackageReference=DRB0008A, PackageVersion=4203482-2/K, PartNumber=TPS73718DRBR, SubFamily="Single Channel LDO", Vdo(Typ)(mV)=130, Vin(Max)(V)=5.5, Vin(Min)(V)=2.2, Vout Adj(Max)(V)=1.8, Vout Adj(Min)(V)=1.8
Y1: library part CMP-200220-000009-1, "CRYSTAL 50MHZ 8PF SMD", Case/Package=SMD/SMT, ESR (Equivalent Series Resistance)=80R, Frequency=50MHz, Frequency Stability=15ppm, Frequency Tolerance=10ppm, Load Capacitance=8pF, Max Operating Temperature=85°C, Min Operating Temperature=-30°C, Mount="Surface Mount", Packaging="Cut Tape"
Y5: library part CMP-OSC-00029-2, "OSC, MEMS, STRATUM 3E, 10.000MHZ, 10PPB STAB, LVCMOS, 3.3V, O/P EN, 7.0X5.0X2.2MM, CQFN-10", Case/Package="10 Lead QFN", Frequency="10 MHz", Frequency Stability="±10 ppb", Internal Part Number=820-00386-00, Manufacturer=SiTime, Manufacturer Part Number=SiT5501AC-WU-33E0-10T, Max Operating Temperature=70°C, Min Operating Temperature=-20°C, Voltage - Supply="3.3 V", Category=Oscillators, Height="2.20mm (max)", Mounting Type="Surface Mount", Output=LVCMOS, RoHS=Yes, Type=OCXO

## Free pads (board coordinates)
  rect 86.61x43.31 hole 31.5 paste+0 mask+4: 4(300,235) 4(300,431.85) 4(300,730.28) 4(300,931.85) 4(1205,235) 4(1205,360.98) 4(1205,439.72) 4(1205,581.46) 4(1205,707.44) 4(1205,786.18) 4(1205,931.85)

## Via types
v1: diameter 16, hole 10, Top Layer to Bottom Layer, 116 vias
v2: diameter 19.68, hole 7.87, Top Layer to Bottom Layer, 25 vias
v3: diameter 19.68, hole 7.87, Top Layer to Bottom Layer, tented top, 1 vias
v4: diameter 14, hole 5.9, Top Layer to Bottom Layer, 1 vias

## Nets (pads, with @x,y where several pads share a name; then routed paths per layer and width w, separated by ;. In a path a pad name is that pad's centre, name@x,y a point inside that pad or via, vN(x,y) a via of type N, cw(c..) or ccw(c..) an arc to the next point about the centre after c; other vN are vias at no path point)
10M_OUT: pad.4@300,931.85 R24.2 | length 165.3
  Layer 1 w5: pad.4@300,931.85 321.65,931.85 340.81,912.7 340.81,899.19 349.34,890.66 349.34,834.11 v1(325,809.76)
DPLL_CSB: U1.5
DPLL_LDO0: C15.2 C17.1 U1.7 | length 178.8
  Top Layer w10: U1.7 749.84,479.84 C15.2 790.6,469.4 824.72,469.4 850.32,495 C17.1
DPLL_LDO1: C16.2 C18.1 U1.30 | length 147.3
  Top Layer w10: C16.2 359.76,540.56 359.76,523.24 368,515 C18.1 369.69,515 404.84,479.84 U1.30
DPLL_LF0: C15.1 U1.8 | length 123.4
  Top Layer w8: U1.8 732.87,499.53 753.34,520 779.37,520 C15.1
DPLL_LF1: C16.1 U1.29 | length 107
  Top Layer w10: C16.1 397.12,542.57 397.12,513.03 410.53,499.61 430.08,499.61 U1.29
DPLL_M0: U1.32
DPLL_M1: R2.1 U1.33 U2.6 | length 946.9
  Top Layer w5: v1(392.05,421.15) 392.23,420.97 429.98,420.97 U1.33 ; v1(858.86,592.5) 860.19,591.17 884.61,591.17 U2.6
  Layer 1 w5: v1(392.05,421.15) 381.28,431.92 381.28,535.76 365.74,551.3 365.74,589.47 391.27,615 521.43,615 525.68,610.74 672.47,610.74 716.71,566.5 737.17,566.5 748.59,577.91 748.59,593.59 760,605 819.2,605 831.69,592.5 v1(858.86,592.5)
  Layer 2 w5: v1(324.49,338.91) 373.91,338.91 401.61,366.61 401.61,408.79 392.05,418.35 v1(392.05,421.15)
DPLL_M2: R1.1 U1.35 U2.5 | length 1193.1
  Top Layer w5: R1.1 365.75,295 381.14,295 v1@381.14,295.88 ; v1(385,295) 385,360.26 406.16,381.42 U1.35 ; U2.5 v1(885.94,628.18)
  Layer 1 w5: v1(385,295) 385,364.94 372.96,376.98 372.96,400.2 367.82,405.34 367.82,491.15 352.54,506.43 352.54,684.61 359.99,692.06 510.01,692.06 519.15,682.92 519.15,635.65 528.31,626.5 725.43,626.5 768.93,670 844.52,670 885.94,628.57 v1(885.94,628.18)
DPLL_M3: R5.1 U1.36 | length 120.1
  Top Layer w5: R5.1 405,355 411.73,361.73 U1.36
DPLL_M4: R6.1 U1.37 | length 116.8
  Top Layer w5: R6.1 449.92,262.8 429.71,283 422.1,283 418,287.1 418,313.02 432.55,327.57 450.79,327.57 456.73,333.52 U1.37
DPLL_M5: U1.1
DPLL_OUT_0A_N: U1.12
DPLL_OUT_0A_P: R35.1 U1.11 U5.2 | length 581.1
  Top Layer w5: U1.11 700.02,558.41 710.54,558.41 730,577.87 v1(730,590) ; v1(1037.91,534.25) 1039.42,532.74 1079.75,532.74 U5.2
  Layer 1 w5: v1(730,590) 730,610 767.08,647.08 v1(841.28,647.08) 841.28,646.69 890.6,597.36 890.6,538.85 954.14,475.31 982.51,475.31 997.87,490.68 997.87,508.38 1022.41,532.92 1036.59,532.92 v1(1037.91,534.25) v1@1035.16,534.25
DPLL_OUT_0B_N: U1.15
DPLL_OUT_0B_P: U1.14
DPLL_OUT_0C_N: C27.1 R23.2 U1.18 | length 472.2
  Top Layer w5: v1(567.72,645) cw(c550.51,627.8) 574.84,627.8 U1.18
  Layer 1 w5: v1(365,965.75) 372.61,958.14 cw(c348.71,934.24) 382.51,934.24 ccw(c392.51,934.24) 385.44,927.17 411.17,901.44 ccw(c475,965.27) 475,875 505.71,844.29 cw(c435,773.58) 535,773.58 535,720.86 ccw(c595.36,720.86) 552.68,678.18 552.93,677.93 ccw(c560,685) 560,675 cw(c560,650.86) 577.07,667.93 580,665 cw(c561.37,665) 574.54,651.83 v1(567.72,645)
DPLL_OUT_0C_P: C26.1 R22.2 U1.17 | length 474.2
  Top Layer w5: U1.17 594.53,626.28 cw(c621.01,626.28) v1(602.28,645)
  Layer 1 w5: v1(410.01,967.84) 403.88,961.7 ccw(c431.34,934.24) 392.51,934.24 418.24,908.51 ccw(c475,965.27) 475,885 cw(c475,875) 482.07,882.07 512.78,851.36 cw(c435,773.58) 545,773.58 545,721.21 ccw(c596.21,721.21) 560,685 cw(c560,650.86) 584.14,675 587.07,672.07 cw(c580,665) 590,665 ccw(c608.63,665) 595.46,651.83 v1(602.28,645)
DPLL_OUT_1A_N: U1.26
DPLL_OUT_1A_P: R39.1 U1.25 U5.3 | length 898.3
  Top Layer w5: v1(410,595) 411.85,593.15 411.85,581.2 414.78,578.27 U1.25 ; v1(1019.64,500.82) v1(1019.64,500.82) 1034.57,515.75 U5.3
  Layer 1 w5: v1(410,595) 645.22,595 688.78,551.44 740.5,551.44 755.56,566.5 851.74,566.5 870,548.24 870,473.89 873.89,470 895,470 935.45,429.55 1004.55,429.55 1019.64,444.64 v1(1019.64,500.82)
DPLL_OUT_1B_N: U1.23
DPLL_OUT_1B_P: U1.22
DPLL_REFA: R13.1 R16.2 U1.47 | length 941.2
  Top Layer w5: U1.47 653.58,330.89 657.85,326.63 657.85,325.82 672.33,311.33 681.48,311.33 688.21,304.61 724.61,304.61 v1(725,305) ; R16.2@1115,408.28 1115,379.97 1120,374.97 1120,355 1133.27,344.32 1134.27,343.51 R13.1 ; R13.1@1143.86,340.39 R13.1@1145,339.25
  Layer 1 w5: v1(725,305) 725,249.22 732.03,242.19 815.58,242.19 815.58,234.08 829.65,220 900,220 908.74,228.74 908.74,258.74 925,275 1055,275 1055,253.6 1065.04,243.57 1065.04,221.98 1072.02,215 1102.07,215 1152.4,265.33 1152.4,292.6 1125,320 1125,396.36 1115,406.36 v1@1115,408.28
  other v1: 1110.33,408.28
DPLL_REFAA: R15.1 R139.1 R140.2 U1.46 | length 631.4
  Top Layer w5: U1.46 634.82,334.23 634.82,323.28 659.77,298.33 676.1,298.33 684.38,290.05 713.75,290.05 722.3,281.5 729.69,281.5 748.53,262.66 v1(748.53,260.69) 748.53,228.95 R140.2@751.81,225.67
  Layer 2 w5: v1(726.65,655) 680,608.35 680,376.16 748.53,307.63 v1(748.53,260.69)
DPLL_REFB: R8.1 R10.2 U1.38 | length 894.3
  Top Layer w5: v1(436.5,301.5) 449.35,314.35 466.15,314.35 475.49,323.69 475.49,334.23 U1.38 ; v1(1132.28,280) 1132.28,251.84 R8.1@1138.91,251.84
  Layer 2 w5: v1(436.5,301.5) 436.5,278.36 487.84,227.02 586.16,227.02 604.66,245.52 635.18,245.52 653.04,227.67 686.8,227.67 702.34,243.21 717.67,243.21 733.2,227.67 766.95,227.67 779.89,240.61 795.21,240.61 806.91,228.91 863.91,228.91 915,280 v1(1132.28,280)
DPLL_REFBB: R9.1 R12.2 U1.39 | length 1380.8
  Top Layer w5: v1(468.5,290.14) 468.5,292.98 495.18,319.66 495.18,334.23 U1.39 ; R9.1@1145,689.25 1145,662.28 v1(1147.28,660)
  Layer 2 w5: v1(468.5,290.14) 468.5,332.84 454.16,347.19 454.16,561.15 530,637 530,732.4 582.6,785 615,785 764.25,934.25 873.03,934.25 v1(1147.28,660)
DPLL_RESETB: R11.1 U1.48 | length 89.9
  Top Layer w5: U1.48 673.27,333.52 675.5,331.28 677.15,331.28 684.09,324.33 743.32,324.33 744.7,322.96 744.78,322.96 753.47,314.27 R11.1
DPLL_SCLK: pad.4@300,730.28 R19.1 R70.1 U1.2 | length 1634.9
  Top Layer w5: pad.4@300,730.28 357.92,730.28 369.37,718.83 R70.1 ; U1.2 719.47,381.42 v1(733.47,367.41)
  Layer 1 w5: pad.4@300,730.28 302.59,730.28 321.75,711.12 321.75,533.86 312.66,524.77 312.66,507.34 323.5,496.5 341.73,496.5 354.82,483.41 354.82,399.96 359.96,394.82 359.96,293.44 383.4,270 460,270 489.92,240.08 548.57,240.08 566.78,258.29 566.78,276.78 636.01,346.01 656.08,346.01 681.9,371.82 681.9,414.73 716.09,448.91 725.26,448.91 747.9,426.27 747.9,393.38 745.42,390.89 745.42,379.36 v1(733.47,367.41)
  Layer 2 w5: v1(733.47,367.41) 708.26,392.62 708.26,453.02 774.2,518.96 853.96,518.96 910,575 910,643.27 v1(898.27,655)
DPLL_SDIO: pad.4@300,431.85 R21.1 R72.1 U1.4 | length 1279.6
  Top Layer w5: pad.4@300,431.85 365.35,431.85 365.35,472.17 R72.1 ; U1.4 700.06,421.01 726.57,421.01 v1(726.79,421.22)
  Layer 1 w5: pad.4@300,431.85 300.85,431.85 320,412.7 320,405 325.74,399.26 337.14,399.26 342.99,393.41 342.99,291.31 382.68,251.62 451.75,251.62 479.19,224.17 595.65,224.17 608.37,236.89 608.37,293.37 644.46,329.46 661.49,329.46 710.39,378.35 710.39,404.82 v1(726.79,421.22)
  Layer 2 w5: v1(726.79,421.22) 726.79,441.79 755,470 898.34,470 1016.73,588.39 v1(1016.73,655)
DPLL_VDD: C1.2 C2.2 C3.2 C6.2 C7.1 C8.2 C9.1 C10.1 C11.1 C12.2 C13.2 C14.2 C23.1 C130.1 C131.1 R22.1 R23.1 U1.6 U1.9 U1.10 U1.13 U1.19 U1.20 U1.24 U1.27 U1.28 U1.31 U1.40 U1.41 U1.45 U5.1 U8.1 | length 2496.1
  Top Layer w5: v1(371.29,625.13) 371.29,608.71 391.5,588.5 391.5,572.48 412.62,551.36 ; U1.28 427.2,519.21 412.62,533.8 412.62,551.36 ; U1.27 425.89,538.9 421.63,543.16 420.82,543.16 412.62,551.36 ; R22.1 657.72,625 658.19,625 669,614.18 669,613.37 673.27,609.11 673.27,607.64 U1.13
  Top Layer w8: C6.2 v1(371.29,625.13) 395.79,625.13 410.01,639.35 v1(411.98,639.35) 413.33,640.71 452.05,640.71 v1(453.4,642.06) v1(492.8,642.06) 494.27,643.53 530.81,643.53 R23.1 ; v1(405.16,458.84) 406.12,459.81 429.81,459.81 U1.31 ; U1.20 535.47,627.8 ; U1.19 555.16,620.59 ; U1.45 614.21,294.1 626.16,282.15 656.57,282.15 667.05,271.68 v1(667.05,270.69) ; v1(1080,598.5) 1081,597.5 U5.1
  Top Layer w10: v1(500,290.75) 500,302.56 515.71,318.27 515.71,335.08 U1.40 ; U1.41 535.47,293.62 538.35,290.75 v1(540,290.75) ; U1.13@673.27,607.64 673.35,607.72 676.14,607.72 691.96,623.53 768.53,623.53 C11.1 ; U1.6 744.89,460.16 761.84,443.21 v1(761.84,441.24) ; U1.9 723.31,519.21 746.19,542.09 766.19,542.09 769.06,544.97 v1(769.06,546.34) ; U1.10 716.7,538.9 757.96,580.16 766.38,580.16 769.25,583.03 v1(769.25,585) 770,585 C11.1@770,623.03
  Layer 1 w8: v1@403.84,458.84 v1(405.16,458.84)
  Layer 1 w30: v1@406.78,458.84 418.11,458.84 419.07,459.81 436.65,442.23 436.65,374 500,310.65 v1(500,290.75)
  Layer 2 w8: v1(856.02,265.79) 884.76,294.52 1103.18,294.52 1121.33,312.67 1121.33,358.97 1109.8,370.5 1077.95,370.5 1050,398.45 1050,439.29 1080,469.29 v1(1080,598.5)
  Layer 2 w15: v1(405.16,458.84) 405.16,534.53
  Layer 2 w20: 405.16,534.53 371.07,568.61 371.07,605.41 371.29,605.63 v1(371.29,625.13) 397.76,625.13 v1(411.98,639.35) 450.69,639.35 v1(453.4,642.06) v1(492.8,642.06)
  Layer 2 w30: v1(500,290.75) v1(540,290.75) 544.25,295 642.74,295 v1(667.05,270.69) ; v1(769.06,546.34) 769.25,546.54 v1(769.25,585)
  other v1: 959.9,235 822.24,278.84
DPLL_XOA: C20.1 U1.42 Y1.1 | length 186
  Top Layer w5: C20.1 547.69,216.41 564.38,216.41 564.7,216.73 575.89,216.73 Y1.1 565.06,227.02 560.92,231.16 560.92,273.7 561.06,273.83 561.06,305.03 555.16,310.92 U1.42
DPLL_XOB: C19.1 U1.43 Y1.3 | length 195
  Top Layer w5: U1.43 574.06,334.37 574.06,288.02 582.23,279.85 605.3,279.85 611.45,273.7 611.45,270.66 625.55,256.55 Y1.3 633.75,250.32 646.63,250.32 655.84,241.11 655.84,223.77 658.77,220.84 676.33,220.84 C19.1
GND: C1.1 C2.1 C3.1 C4.2 C5.1 C6.1 C7.2 C8.1 C9.2 C10.2 C11.2 C12.1 C13.1 C14.1 C17.2 C18.2 C19.2 C20.2 C21.2 C22.2 C23.2 C24.2 C25.2 C89.2 C118.2 C119.2 C122.2 C123.2 C129.2 C130.2 C131.2 pad.4@300,235 pad.4@1205,786.18 R10.1 R12.1 R16.1 R27.2 R35.2 R39.2 R140.1 U1.49 U2.4 U2.7 U2.9 U3.4 U3.8 U3.14 U3.15 U3.17 U5.4 U5.5 U8.4 U8.9 U21.5 Y1.2 Y1.4 Y5.5 | length 788.3
  Top Layer w8: R39.2 1064.16,469.16 1081,486 U5.4 ; v1(1110.33,443.72) 1110,444.04 1110,490 U5.5
  Top Layer w10: C6.1 v1(371.29,656.63) ; v1(365,905) 366.62,905 377.11,894.51 U3.8 ; U3.14 418.24,746.18 v1(418.55,745.86) ; U3.15 437.92,745.28 440.21,742.98 v1(440.21,741.36) ; U3.4 v1(511.95,889.8) ; v1(500,259.25) 500,233.44 510.23,223.21 C20.2 ; C9.2 800.65,546.44 800.65,584.9 v1(800.75,585) ; v1(841.28,615.41) 837.86,611.99 837.86,570.86 C21.2 861.2,569.36 ; 861.22,569.38 885.17,569.38 U2.7 ; v1(976.77,453.36) 1003.67,453.36 1019.47,469.16 R39.2 ; U2.4 1035.69,609.53 1055.16,629 1079,629 v1(1080,630) ; U8.4 1022.83,259.61 v1(1039.13,243.31) ; 1079.25,659.62 1079.25,630.75 v1(1080,630) ; C22.2 v1(1080,630) ; v1(1167.19,308.01) 1167.45,307.74 1167.45,280.26 R10.1
  Layer 1 w10: v1@418.55,745 v1(418.55,745.86)
  other v1: 787.55,222.11 710,224.71 627.52,227.02 930.1,235 586.18,256.55 540,259.25 698.55,269.71 856.02,330.92 1001.4,332.43 970,335 970,360 1002.61,359.99 795.41,379.96 324.14,380.76 846.02,408.45 891.02,408.45 793.34,441.24 888.84,495 331.16,515 801.5,625 1055,655 411.98,670.84 453.4,673.56 492.8,673.56 582.27,702.78 459.06,723.07 579.51,726.2 405,815 448.22,855.97 325,882.72 1139.85,964.56 488.81,967.04
  other v2: 478.39,383.39 521.69,383.39 565,383.39 608.31,383.39 651.61,383.39 478.39,426.69 521.69,426.69 565,426.69 608.31,426.69 651.61,426.69 478.39,470 521.69,470 565,470 608.31,470 651.61,470 478.39,513.31 521.69,513.31 565,513.31 608.31,513.31 651.61,513.31 478.39,556.61 521.69,556.61 565,556.61 608.31,556.61 651.61,556.61
  other v3: 945,580
  other v4: 1182.72,660
NetC26_2: C26.2 R26.1 U3.6 | length 75
  Top Layer w5: U3.6 437.92,929.59 R26.1 441.51,935.01 C26.2
NetC27_2: C27.2 R26.2 U3.7 | length 85.1
  Top Layer w5: C27.2 404.86,934.25 415.32,923.8 415.32,917.2 418.24,914.28 U3.7
NetC89_1: C89.1 U8.3 | length 48
  Top Layer w10: U8.3 998.5,288.98 998.5,244.57 C89.1
NetR3_2: R3.2 U21.1 Y5.1 | length 1030.2
  Layer 1 w5: v1(580,938.19) 792.68,725.51 v1(811.89,725.51)
  Layer 2 w5: v1(811.89,725.51) 856.38,770 1010,770 1103.5,676.5 1103.5,588.5 1136,556 1136,396 1125,385 1091.73,385 v1(1078.53,398.2)
NetR4_2: R4.2 U21.2 | length 677.6
  Layer 1 w5: v1(870.94,725.51) 991.12,725.51 1036.5,680.13 1036.5,576.24 1062.74,550 1062.74,532.74 1050,520 1050,483.93 1032.64,466.58 1032.64,310.29 1047.59,295.34 1053.05,295.34 1090,258.38 v1(1090,237.2)
NetR7_2: R7.2 R19.2 U21.3 Y5.3 | length 1097.8
  Top Layer w5: R19.2@930.87,655.87 U21.3@930.87,724.65
  Top Layer w8: U21.3 U21.3@930.87,724.65 ; R19.2@930.87,655.87 v1(931.73,655)
  Layer 1 w5: v1(556.18,825) 696.18,685 901.73,685 v1(931.73,655)
  Layer 2 w5: v1(931.73,655) 931.73,700.02 955.94,724.22 1013.38,724.22 1036.12,701.48 1036.12,633.88 1060,610 1060,493.93 1030,463.93 1030,395.87 1075.75,350.12 v1(1094.9,350.12)
NetR14_2: R14.2 R21.2 U21.4 Y5.2 | length 752
  Top Layer w5: v1(983.27,655) 989.06,660.79 U21.4
  Layer 1 w5: v1(556.18,875) 732.03,699.15 939.12,699.15 v1(983.27,655) 983.27,505.21 977.51,499.45 v1(977.51,496.48)
NetR15_2: R15.2 Y5.6 | length 58.2
  Top Layer w5: Y5.6 680,658.35 R15.2
NetR17_2: R17.2 U5.7 | length 124.4
  Top Layer w5: U5.7 1148.5,531.5 1148.5,618.89 R17.2
NetR18_2: R18.2 U5.6 | length 90.2
  Top Layer w5: U5.6 1143.47,515.75 1154.71,504.5 1154.71,478.52 1151.51,475.32 1151.51,464.23 R18.2@1145,457.72
NetR24_1: R24.1 U3.12 | length 66.3
  Top Layer w5: R24.1 343.91,780.24 346.84,783.17 346.84,803 349.77,805.93 U3.12
NetR27_1: R27.1 U3.11 | length 53
  Top Layer w5: R27.1 346.67,825.61 U3.11
NetR139_2: R139.2 U21.6 | length 744
  Layer 2 w5: v1(791.84,260.69) 791.84,282.88 693,381.72 693,593 765,665 765,867.6 v1(811.89,914.49)
NetU1_16: U1.16
NetU1_21: U1.21
NetU1_44: U1.44
NetU2_1: U2.1
NetU2_2: U2.2
NetU2_3: U2.3
NetU3_2: U3.2
NetU3_3: U3.3
NetU3_9: U3.9
NetU3_10: U3.10
NetU3_16: U3.16
NetU8_2: U8.2
NetU8_6: U8.6
NetU8_7: U8.7
NetU21_7: U21.7
NetY5_4: Y5.4
NetY5_7: Y5.7
NetY5_8: Y5.8
NetY5_9: Y5.9
P3V3: C4.1 C5.2 C21.1 C22.1 C24.1 C25.1 C118.1 C119.1 C122.1 C123.1 C129.1 pad.4@1205,931.85 R1.2 R2.2 R3.1 R4.1 R5.2 R6.2 R7.1 R11.2 R14.1 R70.2 R72.2 U1.3 U1.34 U2.8 U3.1 U3.5 U3.13 U5.8 U8.5 U8.8 U21.8 U21.9 U21.10 Y5.10 | length 4363.9
  Top Layer w8: v1(323.78,288.64) 330.97,295.82 330.97,305.96 347.67,322.67 347.67,326.4 360.09,338.82 R2.2 357.86,341.13 357.86,378.53 C5.2 375.76,380.76 396.1,401.1 U1.34 ; U3.13 398.55,718.75 v1(404.97,718.75) ; U3.5 483.51,920.41 483.51,931.93 v1(488.81,937.24) ; U3.1 509.07,805.93 515,800 515,749.2 C24.1@495.01,729.21 ; v1(836.36,537.86) 864.47,537.86 877.09,550.47 U2.8 ; R14.1 943.59,494.79 943.59,455.04 v1(945.28,453.36) ; R4.1 1092.45,275.25 1092.45,312.07 v1(1094.9,314.52) ; U5.8 1120,596.31 v1(1122.22,598.53)
  Top Layer w10: U1.3 699.92,401.02 720.85,401.02 722.93,398.95 746.9,398.95 763.92,381.93 v1(763.92,379.96) 763.92,355.12 782.88,336.16 782.88,320.37 R11.2 ; U8.5 1022.83,416.22 1040.41,433.8 v1(1078.53,433.8)
  Top Layer w15: v1(945.28,453.36) 945.28,451.39 946.06,450.6 U8.8
  Layer 1 w15: v1(1078.53,433.8) 1054.1,409.37 1054.1,355.32 v1(1094.9,314.52)
  Layer 1 w20: v1(1078.53,433.8) 1078.53,483.53 1122.22,527.22 v1(1122.22,598.53)
  Layer 1 w30: v1(680,938.19) 696.81,955 935,955 1010,880 1130,880 1130,700 1115.22,685.22 1115.22,605.53 v1(1122.22,598.53) ; v1(836.36,537.86) 836.36,450.5 v1@845.56,441.3 ; v1(846.02,438.26) 876.99,438.26
  Layer 2 w5: 345.66,288.64 346.01,288.64 421.42,364.05 421.42,430.98 412.06,440.34 392.03,440.34 346.74,485.63 346.74,491.48
  Layer 2 w10: v1(763.92,379.96) 822.21,438.26 v1(846.02,438.26) ; v1(891.02,438.26) 928.56,438.26 943.65,453.36 v1(945.28,453.36)
  Layer 2 w15: v1(945.28,453.36) 945.28,453.09 953.27,445.09 953.27,443.62 990.47,406.43 991.21,406.43 1065.52,332.12 1077.02,332.12 1094.63,314.52 v1(1094.9,314.52)
  Layer 2 w20: v1(323.78,288.64) 345.66,288.64 405,229.29 v1(405,227.2) v1(450,227.2) ; v1(328.59,473.33) 346.74,491.48 360.18,504.92 360.18,533.78 331.59,562.38 331.59,661.59 388.75,718.75 ; v1(404.97,718.75) 388.75,718.75 ; v1(488.87,723.07) 485.95,725.98 485.95,790 ; 1054.16,929.62 1023.78,960 701.81,960 v1(680,938.19) 637.62,938.19 611.62,912.19 567.81,912.19 542.76,937.24 v1(488.81,937.24) 488.81,909.56 485.95,906.71 485.95,790 ; 388.75,718.75 388.75,752.83 407.78,771.86 428.04,771.86 446.17,790 485.95,790
  Layer 2 w40: 1054.16,929.62 1056.4,931.85 pad.4@1205,931.85
PPS_DISC_IN: pad.4@1205,235 R8.2 | length 79.5
  Top Layer w5: R8.2@1131.64,220.14 1168.49,220.14 1183.35,235 pad.4@1205,235
PPS_MEAS_IN0: pad.4@1205,707.44 R9.2 | length 65.5
  Top Layer w5: R9.2@1145,720.75 1157.12,708.63 1203.81,708.63 pad.4@1205,707.44
PPS_MEAS_IN1: pad.4@1205,360.98 R13.2 | length 64
  Top Layer w5: R13.2@1145,370.75 1195.24,370.75 pad.4@1205,360.98
PPS_OUT_0: pad.4@1205,581.46 R17.1 | length 92.8
  Top Layer w5: R17.1@1185,627.22 1185,562.3 1204.15,581.46 pad.4@1205,581.46
PPS_OUT_1: pad.4@1205,439.72 R18.1 | length 67.2
  Top Layer w5: R18.1@1145,422.28 1187.56,422.28 pad.4@1205,439.72

## Polygon pours and split planes (outlines as drawn)
DPLL_VDD on Top Layer "NONET_L-01_P-001" (solid, remove dead copper, pour order 5): 539.03,652.7 539.03,627.8 565.5,627.8 565.5,615 531.67,615 461.61,615 461.61,605 430,605 430,625.13 394.73,625.13 394.73,644.81 524.69,644.81 524.69,653.16
DPLL_VDD on Top Layer "NONET_L-01_P-001" (solid, remove dead copper, pour order 4): 952.95,260 979.47,260 979.47,210 813.54,210 813.54,290.55 905,290.55 905,305 952.95,305 952.95,295.63
GND on Top Layer "NONET_L-01_P-001" (solid, remove dead copper, pour order 3): 1159.52,832.97 1199,832.97 1199,764.53 1146.63,764.53 1146.63,831.61
GND on Top Layer "NONET_L-01_P-001" (solid, remove dead copper, pour order 2): 1028.43,727.2 1103.5,727.2 1103.5,645 1040,645 1040,685 1028.43,685 1028.43,725.84
P3V3 on Top Layer "NONET_L-01_P-001" (solid, remove dead copper, pour order 0): 1187.08,880.75 1145,880.75 1145,870 1095,870 1095,900 900,900 900,965 1110,965 1110,940.64 1185,940.64 1185,925
GND on Bottom Layer "NONET_L-01_P-001" (solid, remove dead copper, pour order 1): 300,987.4 1205.51,987.4 1205.51,200 300,200
GND on Layer 1 "NONET_L-01_P-001" (solid, remove dead copper, pour order 7): 300,987.4 1205.51,987.4 1205.51,200 300,200 300,987.4 321.63,987.4
DPLL_VDD on Layer 1 "NONET_L-01_P-001" (solid, remove dead copper, pour order 6): 808.43,554.3 808.43,415 889.46,415 889.46,236.6 644.11,236.6 644.11,374.42 726.47,374.42 726.47,561.11 808.17,561.11 808.17,536.5
GND on Layer 2 "NONET_L-01_P-001" (solid, remove dead copper, pour order 8): 300,987.4 1205.51,987.4 1205.51,200 300,200 300,987.4

## Silkscreen, mask and mechanical layers (free items; w line width, h text height)
Bottom Overlay:
  text "PPSDO V2" at 910,880 h40
  text "Julian St. James" at 1050,790 h40